# Altium PCB NILINET_RFT.PcbDoc
Units mm, origin at the board's own origin, x right, y up, seen from the top; angles counter-clockwise.
Board outline 40.64 x 75.25 mm, 2 copper layers (Top Layer, Bottom Layer); 32 components, 25 nets, 113 pads, 78 vias.
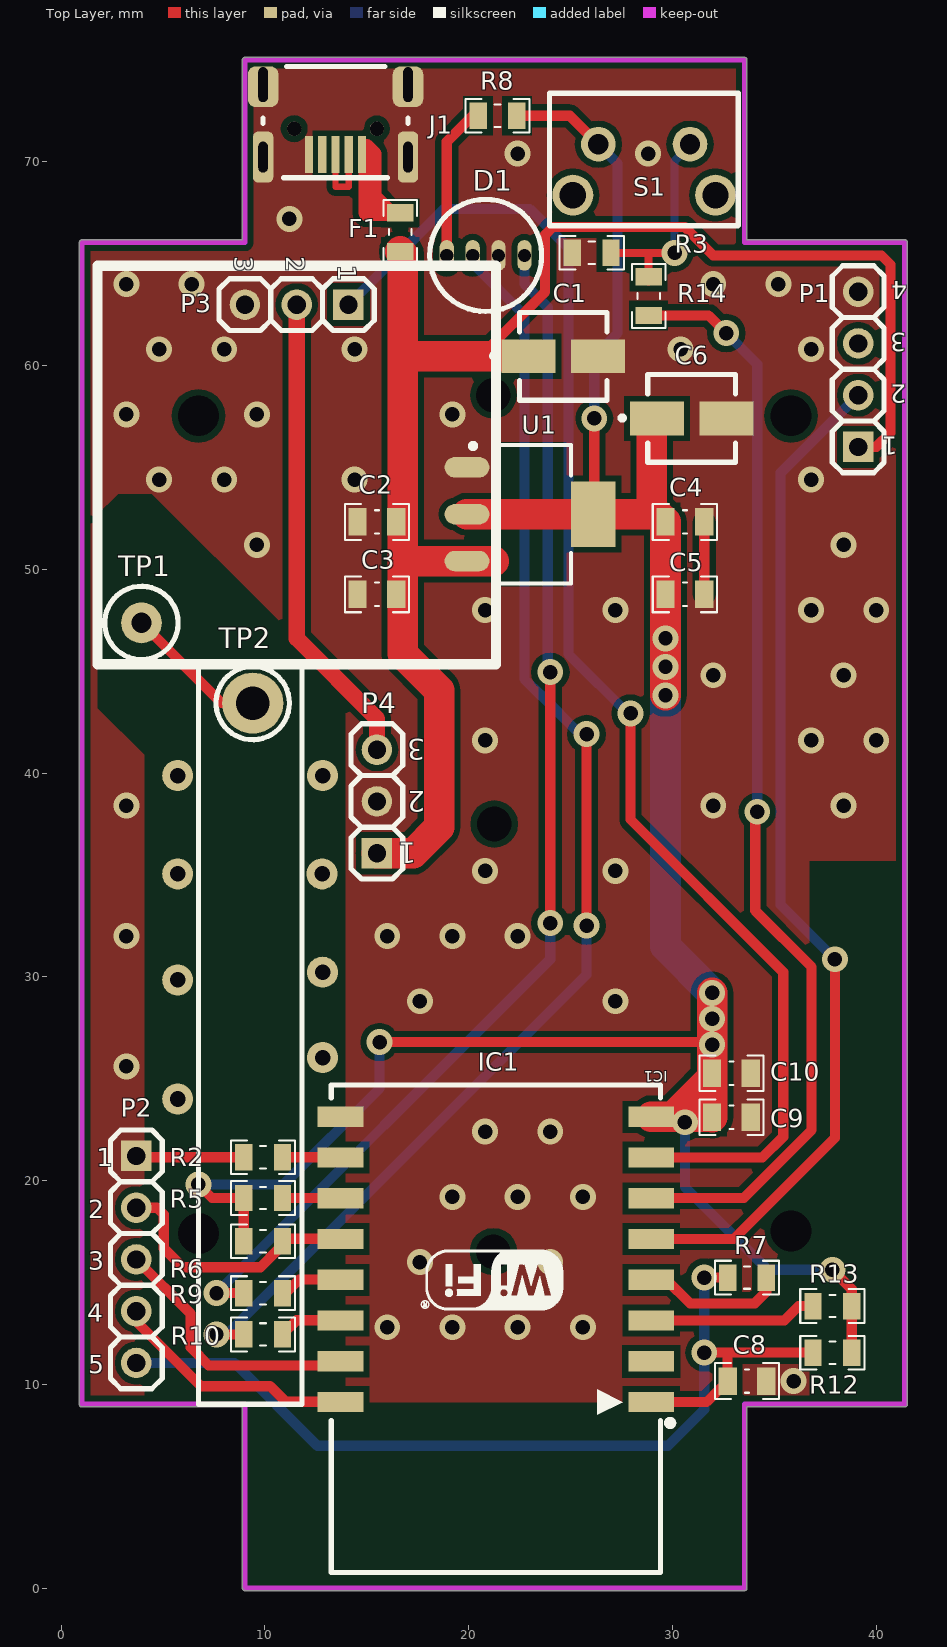
[diagram p0: Top Layer view]
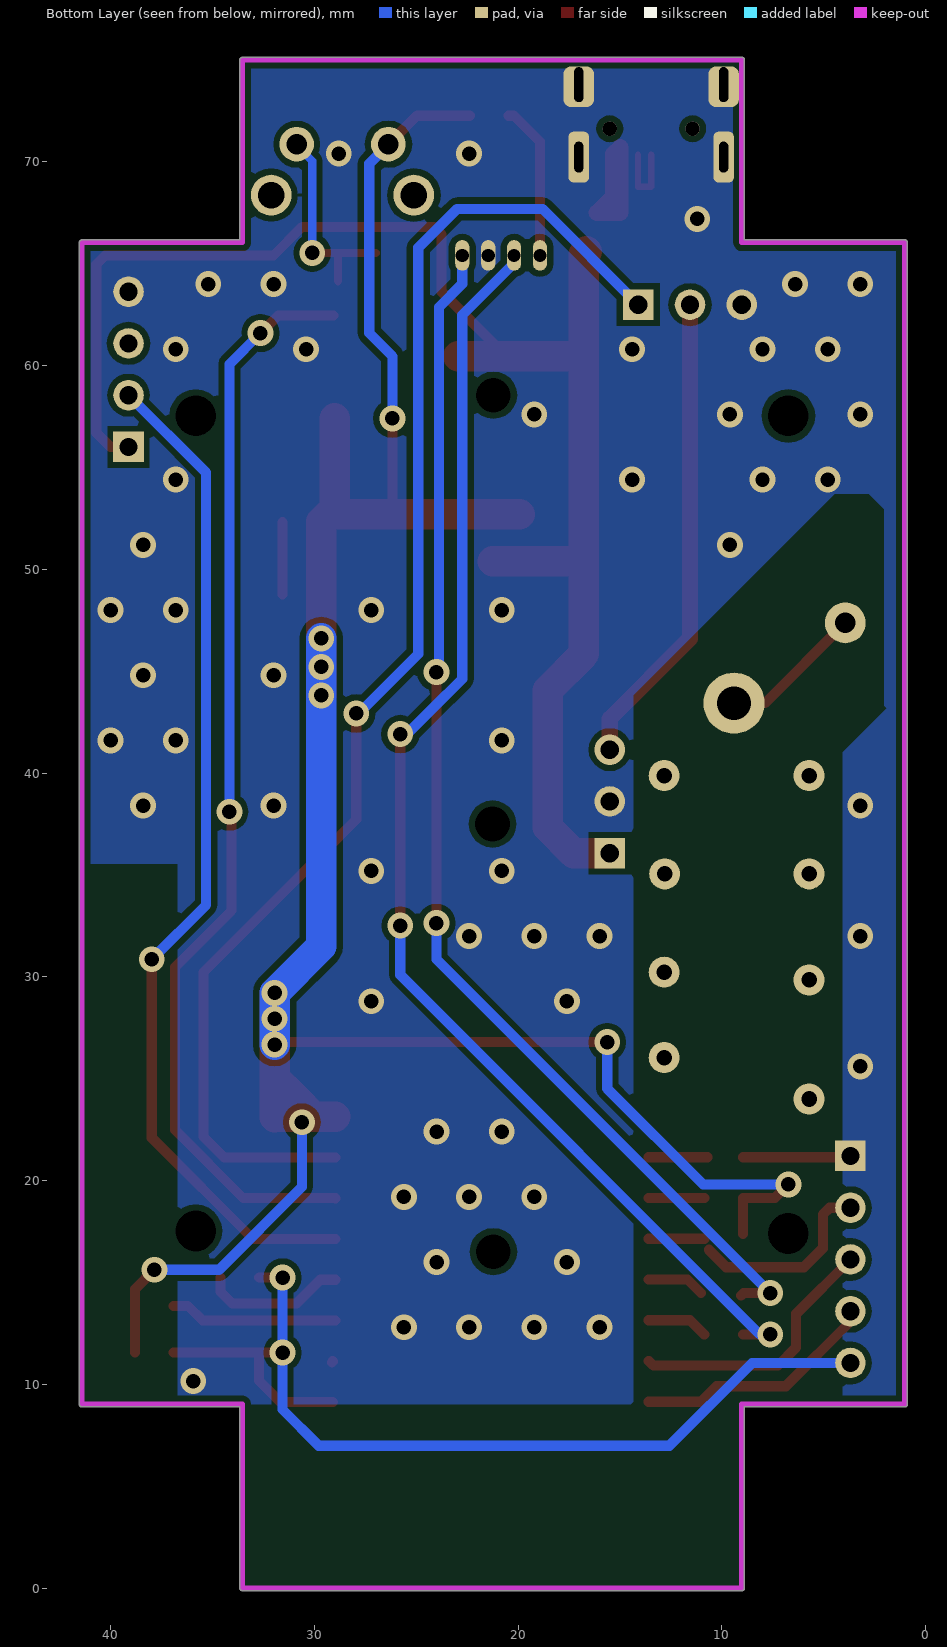
[diagram p1: Bottom Layer view, seen from below]

## Layer stack, top to bottom
Top Solder: solder mask 0.0102, Solder Resist, Dk 3.5
Top Layer: signal copper 0.0356
Dielectric 1: dielectric 0.32, FR-4, Dk 4.8
Bottom Layer: signal copper 0.0356
Bottom Solder: solder mask 0.0102, Solder Resist, Dk 3.5

## Board outline
1.016,8.89 cw(c1.016,9.017) 0.889,9.017 0.889,66.04 cw(c1.016,66.04) 1.016,66.167 8.89,66.167 8.89,75 cw(c9.017,75) 9.018,75.127 33.527,75.127 cw(c33.528,75) 33.655,75 33.655,66.167 41.402,66.167 cw(c41.402,66.04) 41.529,66.04 41.529,9.017 cw(c41.402,9.017) 41.402,8.89 33.655,8.89 33.655,0 cw(c33.528,0) 33.528,-0.127 9.017,-0.127 cw(c9.017,0) 8.89,0 8.89,8.89

## Design rules (kind name [scope] priority, off if disabled: settings)
Clearance [All] p1: gap=0.254 ignorepadtopadclearanceinfootprint=FALSE except(0: Arc-Hole Track-Hole SMDPad-Hole THPad-Hole Via-Hole Fill-Hole Poly-Hole Region-Hole Text-Hole; 0.2: SMDPad-SMDPad SMDPad-THPad SMDPad-Via SMDPad-Fill SMDPad-Region SMDPad-Text; 0.3: Arc-Poly Track-Poly SMDPad-Poly THPad-Poly Via-Poly Fill-Poly Poly-Poly)
PlaneClearance [All] p1: clearance=0.3
PlaneConnect [All] p1: planeconnectstyle=Direct reliefexpansion=0.508 reliefentries=4 reliefconductorwidth=0.254 reliefairgap=0.254
PolygonConnect [All] p1: connectstyle=Direct reliefconductorwidth=0.254 reliefentries=4 polygonreliefangle="90 Angle" airgapwidth=0.254
RoutingVias [All] p1: holewidth=0.7 width=1.27 viastyle="Through Hole" minholewidth=0.7 minwidth=1.27 maxholewidth=0.7 maxwidth=1.27
SolderMaskExpansion [All] p1: expansion=0.102
Width [All] p1: maxlimit=2 minlimit=0.2 preferedwidth=0.3
28 further rules are at their usual default settings.

## Components (designator, comment, footprint, x,y, rotation, side; value= is the part's Value field where it differs from the comment)
C1 "10Uf" UWT(4X5.4) 24.638,60.452 r0 top
C2 "4.7uF" CAP0805 15.494,52.324 r0 top value=100nF
C3 "1uF" CAP0805 15.494,48.768 r0 top value=100nF
C4 "4.7uF" CAP0805 30.607,52.324 r180 top value=100nF
C5 "1uF" CAP0805 30.607,48.768 r180 top value=100nF
C6 "22Uf" UWT(4X5.4) 30.939,57.404 r0 top
C8 "100nF" CAP0805 33.655,10.16 r180 top
C9 "22uF" CAP0805 32.893,23.114 r180 top value=100nF
C10 "100nF" CAP0805 32.893,25.273 r180 top
D1 "RGB_LED" RGB_LED 20.828,65.405 r90 top
F1 "0" RES0805 16.637,66.548 r90 top
IC1 "ESP8266 ESP_12" "ESP8266 ESP_12" 21.336,16.129 r180 top
J1 "USB Connector" MicroUSB111 17.145,75.311 r180 top
P1 "MHDR_1X04" MHDR1X04-254P 39.116,56.007 r90 top
P2 "MHDR_1X05" MHDR1X05-254P 3.683,21.209 r270 top
P3 "MHDR_1X03" MHDR1X03-254P 14.097,62.992 r180 top
P4 "MHDR_1X03" MHDR1X03-254P 15.494,36.068 r90 top
R2 "10K" RES0805 9.906,21.144 r180 top
R3 "10K" RES0805 26.035,65.532 r180 top
R5 "10K" RES0805 9.906,19.144 r180 top
R6 "10K" RES0805 9.906,17.018 r180 top
R7 "0" RES0805 33.655,15.24 r180 top
R8 "220" RES0805 21.414,72.263 r180 top
R9 "220" RES0805 9.906,14.478 r180 top
R10 "220" RES0805 9.906,12.446 r180 top
R12 "10K" RES0805 37.846,11.557 r0 top
R13 "10K" RES0805 37.846,13.843 r0 top
R14 "10K" RES0805 28.829,63.41 r90 top
S1 "Switch PB" SwitchRight 32.211,73.366 r180 top
TP1 "Test Point" "Test Point"#1 3.937,47.371 r0 top
TP2 "Test Point" "Test Point"#2 9.398,43.434 r0 top
U1 "3V3" SOT223 23.114,52.705 r0 top

## Footprints (in the part's own frame and the unit in brackets; to place one, negate y for a bottom-side part, rotate by r counter-clockwise, add the part's x,y. Pads: shape width x height; smd on the part's side, far side on the other; paste and mask are expansions set on the pad)
CAP0805 [mm] "Chip Capacitor, 2-Leads, Body 2/00x1/25mm, IPC Medium Density DESIGNER:ABBAS BASEREH"
  rect 0.9x1.35 smd: 1(-0.95,0) 2(0.95,0)
  silkscreen extent -1.58,-0.87 1.58,0.87, body extent -1.02,-0.65 1.02,0.65, height 0.5
"ESP8266 ESP_12" [mm] "ESP8266 ESP-12"
  rect 2.25x1 smd: 1(-7.625,7) 2(-7.625,5) 3(-7.625,3) 4(-7.625,1) 5(-7.625,-1) 6(-7.625,-3) 7(-7.625,-5) 8(-7.625,-7) 9(7.625,-7) 10(7.625,-5) 11(7.625,-3) 12(7.625,-1) 13(7.625,1) 14(7.625,3) 15(7.625,5) 16(7.625,7)
  silkscreen extent -8.7,-8.57 8.08,15.37, body extent -7.86,-8.52 8.16,15.51, height 3.82
MHDR1X03-254P [mm] "Male Header 1X03 with 2.54 mm Pitch"
  rect 1.5x1.5 hole 0.9: 1(0,0)
  round 1.5 hole 0.9: 2(2.54,0) 3(5.08,0)
  silkscreen extent -1.27,-1.27 6.35,1.27, body extent -1.27,-1.27 6.35,1.27, height 8.43
MHDR1X04-254P [mm] "Male Header 1X04 with 2.54 mm Pitch"
  rect 1.5x1.5 hole 0.9: 1(0,0)
  round 1.5 hole 0.9: 2(2.54,0) 3(5.08,0) 4(7.62,0)
  silkscreen extent -1.27,-1.27 8.89,1.27, body extent -1.27,-1.27 8.89,1.27, height 8.43
MHDR1X05-254P [mm] "Male Header 1X05 with 2.54 mm Pitch"
  rect 1.5x1.5 hole 0.9: 1(0,0)
  round 1.5 hole 0.9: 2(2.54,0) 3(5.08,0) 4(7.62,0) 5(10.16,0)
  silkscreen extent -1.27,-1.27 11.43,1.27, body extent -1.27,-1.27 11.43,1.27, height 8.43
MicroUSB111 [mm]
  rect 0.4x1.8 smd: 1(2.383,4.953) 2(3.033,4.953) 3(3.683,4.953) 4(4.333,4.953) 5(4.983,4.953)
  rrect50% 1x2.5 hole 1.5 slot 0.45 at 0 deg: 5(0.127,5.08) 5(7.239,5.08)
  rrect50% 1.5x2 hole 1.7 slot 0.45 at 0 deg copper offset 0,0.1: 5(0.127,1.524) 5(7.239,1.524)
  round 0.7 hole 0.7: 6(1.651,3.683) 6(5.715,3.683)
  silkscreen extent 0.13,0.64 7.24,6.1
RES0805 [mm] "Chip Resistor, 2-Leads, Body 2/00x1/25mm, IPC Medium Density DESIGNER:ABBAS BASEREH"
  rect 0.85x1.3 smd: 1(-0.95,0) 2(0.95,0)
  silkscreen extent -1.58,-0.82 1.58,0.82, body extent -1.02,-0.65 1.02,0.65, height 0.5
RGB_LED [mm]
  oval 1.5x0.7 hole 0.65: 1(0,1.905) 2(0,0.635) 3(0,-0.635) 4(0,-1.905)
  silkscreen extent -2.75,-2.75 2.75,2.75
SOT223 [mm] "SOT223, 4-Leads, Body 6.5x3.5mm, Pitch 2.30mm-Designer Abbas Basereh"
  oval 2.2x1 smd: 1(-3.2,2.3) 2(-3.2,0) 3(-3.2,-2.3)
  rect 2.2x3.2 smd: 4(3,0)
  Top Layer pour cut-out: -1.7,3.556 1.7,3.556 1.7,-3.556 -1.7,-3.556
  silkscreen extent -3.02,-3.4 1.9,3.47, body extent -3.5,-3.25 3.5,3.25, height 1.7
SwitchRight [mm]
  round 2 hole 1.3: 0(0.1,5) 0(7.1,5)
  round 1.7 hole 1: 1(1.35,2.5) 2(5.85,2.5)
  silkscreen extent -1.02,0 8.25,6.5
"Test Point"#1 [mm]
  round 2 hole 1: 1(0,0)
  silkscreen extent -1.8,-1.8 1.8,1.8, body extent -1.59,-1.58 1.59,1.59, height 5.65
"Test Point"#2 [mm]
  round 3 hole 1.651: 1(0,0)
  silkscreen extent -1.8,-1.8 1.8,1.8, body extent -1.59,-1.58 1.59,1.59, height 5.65
UWT(4X5.4) [mm]
  rect 2.65x1.65 smd: 1(-1.7,0) 2(1.7,0)
  silkscreen extent -3.51,-2.15 2.15,2.15

## Part data
C1 C6: library part UWT1C100MCL1GB, "Capacitor Polarised", Manufacturer_Name=Nichicon, Mouser Part Number=647-UWT1C100MCL1B, RS Part Number=5201854P, Allied_Number=70409828, Allied Price/Stock=https://www.alliedelec.com/nichicon-uwt1c100mcl1gb/70409828/, Datasheet Link=http://www.nichicon.co.jp/english/products/pdfs/e-uwt.pdf, Manufacturer_Part_Number=UWT1C100MCL1GB, Mouser Price/Stock=https://www.mouser.co.uk/ProductDetail/Nichicon/UWT1C100MCL1GB?qs=VVKQmw408U%252BpNF7TgczwPw%3D%3D, RS Price/Stock=http://uk.rs-online.com/web/p/products/5201854P
C2 C3 C4 C5 C8 C9 C10: library part "CAP SMD PACKAGE", "TOTAL CAPACITOR SMD PACK", Data=2017-3-10, Desc.="CAP SMD TOTAL PACKAGES", Designer="Abbas Basereh"
F1 R2 R3 R5 R6 R7 R8 R9 R10 R12 R13 R14: library part "RES SMD PACKAGE", "TOTAL SMD RESISTOR PACK", Data=2017-3-10, Desc.="RES SMD PAKAGES", Designer="Abbas Basereh"
IC1: "ESP8266 ESP-12", IC=ESP8266-EX, LatestReviewer="Zion Blue", LatestRevisionData=14-Apr-2015, LatestRevisionNote="Include 3D body and Footprint", Published=14-Apr-2015, Publisher="Cynetik Group", Vendor=Ai-thinker
J1: library part "USB MICRO", "USB Connector MICRO-B Type", Max Current=1600mA, Category=Connector, ComponentLink1Description=Datasheet, ComponentLink2Description=Reference, Designer="ABBAS BASEREH", Mounting Technology="Surface Mount\Through-Hole", Pin Count=5-7, Publisher="ABBAS BASEREH", Status=Unreleased, Update=1395-11-17
P1: "Male Header 1X04"
P2: "Male Header 1X05"
P3 P4: "Male Header 1X03"
S1: "Push Button Switch"
U1: library part AMS1117-x.x, "x.x Volt, 800mA Low-Dropout Linear Regulator, 4-pin SOT-223", Data=16-12-2016, Designer="Ali Hafizi"

## Free pads (board coordinates)
  round 0 hole 2: 2(6.731,17.399) 2(6.731,57.531) 2(35.814,17.526) 2(35.814,57.531)
  round 0 hole 1.7: 2(21.209,16.51) 2(21.209,58.547) 2(21.25,37.5)
  round 1.524 hole 0.762: 3(5.715,24.003) 3(5.715,29.845) 3(5.715,35.052) 3(5.715,39.878) 3(12.8,35.052) 3(12.827,26.035) 3(12.827,30.226) 3(12.827,39.878)

## Via types
v1: diameter 1.27, hole 0.711, Top Layer to Bottom Layer, tented both sides, 78 vias

## Nets (pads, with @x,y where several pads share a name; then routed paths per layer and width w, separated by ;. In a path a pad name is that pad's centre, name@x,y a point inside that pad or via, vN(x,y) a via of type N, cw(c..) or ccw(c..) an arc to the next point about the centre after c; other vN are vias at no path point)
+3.3V: C4.2 C5.2 C6.1 C9.2 C10.2 IC1.8 R5.2 R6.2 R8.1 R12.2 R13.2 S1.2 U1.2 U1.4 | length 133.3
  Top Layer w0.5: v1(6.731,19.812) 7.399,19.144 R5.2 R6.2@8.956,17.37 ; v1(15.621,26.797) 31.496,26.797 31.656,26.957 v1(31.943,26.67) ; R8.1 24.964,72.263 S1.2 ; U1.4 26.162,52.753 v1(26.162,57.404) ; v1(30.607,22.86) 32.197,22.86 C9.2 ; v1(37.846,15.621) 38.796,14.671 R13.2 R12.2
  Top Layer w1.5: U1.2 U1.4 C4.2@29.276,52.705 ; C6.1@28.985,57.404 28.985,52.996 C4.2@29.276,52.705 ; v1(29.657,43.815) v1(29.657,45.212) v1(29.657,46.609) C5.2 C4.2 C4.2@29.276,52.705 ; C9.2@31.928,23.129 IC1.8 30.024,23.129 30.976,24.081 C10.2@31.943,25.048 ; C9.2 C10.2@31.943,25.048 ; v1(31.943,29.21) v1(31.943,27.94) v1(31.943,26.67) C10.2@31.943,25.048
  Bottom Layer w0.5: v1@6.681,19.812 6.681,19.735 v1@6.858,19.558 ; v1(6.731,19.812) 10.922,19.812 15.621,24.511 v1(15.621,26.797) ; v1(26.162,57.404) 26.162,60.452 27.305,61.595 27.305,69.902 S1.2@26.381,70.826 ; v1(30.607,22.86) 30.607,19.685 34.671,15.621 v1(37.846,15.621)
  Bottom Layer w1.5: v1(29.657,46.609) v1(29.657,45.212) v1(29.657,43.815) 29.657,31.496 v1(31.943,29.21) v1(31.943,27.94) v1(31.943,26.67)
+5V: C1.1 C2.2 C3.2 F1.1 P1.1 P4.1 U1.3 | length 77.8
  Top Layer w0.5: 20.574,60.452 23.749,63.627 23.749,66.421 24.13,66.802 30.607,66.802 32.004,65.405 40.259,65.405 40.702,64.962 40.702,56.704 40.005,56.007 P1.1
  Top Layer w1.5: P4.1 17.272,36.068 18.542,37.338 18.542,44.069 16.764,45.847 16.764,48.768 16.764,50.165 16.764,50.405 ; F1.1 16.764,65.471 16.764,50.405 ; 17.526,60.452 20.574,60.452 C1.1 ; 21.236,50.405 U1.3 16.764,50.405
+12V: P3.2 P4.3 | length 23.2
  Top Layer w0.8: P3.2@11.557,63.246 11.557,46.609 15.494,42.672 P4.3@15.494,41.656
ADC: IC1.2 | length 0.1
  Top Layer w0.5: IC1.2@29.088,11.129 IC1.2@29.135,11.082
EN: IC1.3 R13.1 | length 8.2
  Top Layer w0.5: IC1.3 35.481,13.129 36.195,13.843 R13.1
GND: C1.2 C2.1 C3.1 C4.1 C5.1 C6.2 C8.1 C9.1 C10.1 D1.3 IC1.9 J1.5 P1.4 P2.1 P3.3 P4.2 R2.2 R3.2 U1.1 | length 8.9
  Top Layer w0.5: P2.1 3.748,21.144 R2.2 ; C5.1 C4.1
  other v1: 35.941,10.16 16,12.8 19.2,12.8 22.4,12.8 25.6,12.8 17.6,16 24,16 19.2,19.2 22.4,19.2 25.6,19.2 20.8,22.4 24,22.4 3.2,25.6 17.6,28.8 27.2,28.8 3.2,32 16,32 19.2,32 22.4,32 20.8,35.2 27.2,35.2 3.2,38.4 32,38.4 38.4,38.4 20.8,41.6 36.8,41.6 40,41.6 32,44.8 38.4,44.8 20.8,48 27.2,48 36.8,48 40,48 9.6,51.2 38.4,51.2 4.8,54.4 8,54.4 14.4,54.4 36.8,54.4 3.2,57.6 9.6,57.6 19.2,57.6 4.8,60.8 8,60.8 14.4,60.8 30.4,60.8 36.8,60.8 3.2,64 6.4,64 32,64 35.2,64 11.2,67.2 22.4,70.4 28.8,70.4
GPIO0: IC1.12 P2.2 R6.1 | length 12.2
  Top Layer w0.5: P2.2 4.699,18.669 5.035,18.333 5.035,16.682 5.969,15.748 9.779,15.748 R6.1@10.631,16.6 ; R6.1@10.856,17.145 10.857,17.144 IC1.12@13.579,17.144
GPIO2: IC1.11 R5.1 | length 2.7
  Top Layer w0.5: R5.1 IC1.11@13.579,19.144
GPIO4: IC1.13 R9.1 | length 2.8
  Top Layer w0.5: R9.1@11.018,14.478 11.684,15.144 IC1.13@13.579,15.144
GPIO5: IC1.14 R10.1 | length 3
  Top Layer w0.5: R10.1@10.859,12.446 11.557,13.144 IC1.14@13.579,13.144
GPIO12: R3.1 R14.2 S1.1 | length 10.1
  Top Layer w0.4: R3.1 28.829,65.532 ; R14.2@28.829,64.135 R14.2 28.829,65.532 ; v1(30.099,65.532) 28.829,65.532
  Bottom Layer w0.4: v1(30.099,65.532) 30.099,70.044 S1.1@30.881,70.826
GPIO13: IC1.7 P3.1 | length 68.6
  Top Layer w0.5: v1(27.94,42.926) 27.94,37.719 35.433,30.226 35.433,22.148 34.414,21.129 IC1.7
  Bottom Layer w0.5: P3.1 18.796,67.691 22.987,67.691 24.892,65.786 24.892,45.847 v1@27.94,42.799
GPIO14: IC1.5 P1.2 | length 50.2
  Top Layer w0.5: IC1.5 33.004,17.129 37.973,22.098 37.973,23.368 37.973,23.622 v1(37.973,30.861)
  Bottom Layer w0.5: v1(37.973,30.861) 35.306,33.528 35.306,54.737 P1.2
GPIO15: IC1.10 R2.1 | length 2.9
  Top Layer w0.5: R2.1@10.693,21.144 IC1.10@13.579,21.144
GPIO16: IC1.4 R7.1 | length 7.1
  Top Layer w0.5: IC1.4 29.702,15.129 30.861,13.97 34.036,13.97 34.605,14.539 R7.1
NetD1_1: D1.1 R8.2 | length 7.7
  Top Layer w0.5: D1.1 18.923,70.993 20.193,72.263 R8.2
NetD1_2: D1.2 R10.2 | length 65
  Top Layer w0.5: v1(7.62,12.446) R10.2 ; v1(25.781,32.512) 25.527,32.512 25.781,32.766 v1(25.781,41.91)
  Bottom Layer w0.5: v1(7.62,12.446) 8.128,12.446 25.781,30.099 v1(25.781,32.512) ; D1.2 20.193,65.024 22.733,62.484 22.733,44.617 23.531,43.819 23.554,43.819 25.463,41.91 v1(25.781,41.91)
NetD1_4: D1.4 R9.2 | length 59.9
  Top Layer w0.5: v1(7.62,14.478) 8.927,14.478 R9.2@9.054,14.351 ; v1(24.003,32.639) v1(24.003,44.958)
  Bottom Layer w0.5: v1(7.62,14.478) 24.003,30.861 v1(24.003,32.639) ; D1.4 22.733,64.008 23.876,62.865 23.876,45.212 24.13,44.958 v1(24.003,44.958)
NetF1_2: F1.2 J1.1 | length 8.5
  Top Layer w0.8: 15.318,67.83 15.318,69.088 15.318,70.384 14.986,70.716 14.986,67.498 16.129,67.498 15.318,68.309
NetIC1_6: IC1.6 R14.1 | length 54.4
  Top Layer w0.5: IC1.6 28.976,19.144 33.495,19.144 36.83,22.479 36.83,30.48 34.061,33.249 34.061,37.998 v1(34.163,38.1) ; R14.1@29.054,62.46 31.774,62.46 v1(32.639,61.595) v1@32.639,61.87
  Bottom Layer w0.5: v1(32.639,61.595) 34.163,60.071 v1(34.163,38.1)
NetJ1_2: J1.2 J1.3 | length 3.8
  Top Layer w0.3: J1.3 13.462,68.777 14.112,68.777 J1.2
NetTP1_1: TP1.1 TP2.1 | length 7.1
  Top Layer w0.5: TP1.1 7.874,43.434 TP2.1
RST: C8.2 IC1.1 P2.5 R7.2 R12.1 | length 48.8
  Top Layer w0.5: IC1.1@29.088,9.129 31.674,9.129 C8.2 32.705,11.491 32.639,11.557 ; v1(31.557,11.557) 32.639,11.557 ; v1(31.557,15.24) R7.2 ; R12.1 32.639,11.557
  Bottom Layer w0.5: P2.5 8.509,11.049 12.573,6.985 29.777,6.985 31.557,8.765 v1(31.557,11.557) v1(31.557,15.24) v1@31.557,15.296
RX: IC1.15 P2.3 | length 13.1
  Top Layer w0.5: P2.3 6.35,13.462 6.35,11.811 7.239,10.922 13.357,10.922 IC1.15@13.579,11.144
TX: IC1.16 P2.4 | length 12
  Top Layer w0.5: P2.4 3.683,13.081 6.858,9.906 10.25,9.906 11.012,9.144 IC1.16@13.579,9.144
pads on no net: J1.4 J1.6 P1.3 S1.0

## Polygon pours and split planes (outlines as drawn)
GND on Top Layer (solid, remove dead copper, pour order 28): 1.016,66.04 9.017,66.04 9.017,75 33.528,75 33.528,66.04 41.402,66.04 41.402,35.687 36.703,35.687 36.703,9.017 36.591,9.129 13.97,9.129 13.97,44.196 4.445,53.721 2.794,53.721 1.524,52.451 1.778,52.197 1.778,43.18 4.064,40.894 4.064,9.271 4.318,9.017 1.016,9.017
no net on Top Layer "Top Layer-No Net" (solid, remove dead copper, pour order 14): 9.017,75
GND on Bottom Layer (solid, remove dead copper, pour order 30): 1.016,66.04 8.763,66.04 9.017,66.294 9.017,75 33.528,75 33.528,66.04 41.275,66.04 41.275,35.687 41.402,35.56 36.703,35.56 36.703,9.144 36.83,9.017 14.478,9.017 14.351,9.144 14.351,43.815 4.445,53.721 2.794,53.721 2.032,52.959 2.032,43.307 1.905,43.18 4.064,41.021 4.064,9.017 3.937,8.89 1.143,8.89 1.016,9.017

## Keep-outs
Keep-Out Layer:
  lines w0.254: 1.016,9.017 1.016,66.04 9.017,66.04 9.017,75 33.528,75 33.528,66.04 41.402,66.04 41.402,9.017 33.528,9.017 33.528,0 9.017,0 9.017,9.017 1.016,9.017

## Silkscreen, mask and mechanical layers (free items; w line width, h text height)
Top Overlay:
  lines w0.254: 6.731,9.017 6.731,45.466 11.811,45.466 11.811,9.017 6.731,9.017
  lines w0.5: 1.778,64.77 1.778,45.339 21.336,45.339 21.336,64.897 1.778,64.897

## Text inside footprints (layer, text, board x,y; h text height)
IC1: Mechanical 13 "ANTENNA AREA" at 29.209,1.255 h0.9 r180; Mechanical 13 "CUTOUT POLYGON" at 29.209,1.763 h0.9 r180
P1: Top Overlay "1" at 41.052,56.515 h0.9 r180; Top Overlay "2" at 41.48,59.055 h0.9 r180; Top Overlay "3" at 41.48,61.595 h0.9 r180; Top Overlay "4" at 41.528,64.135 h0.9 r180
P2: Top Overlay "1" at 1.747,20.701 h0.9; Top Overlay "1" at 1.747,20.701 h0.9; Top Overlay "2" at 1.319,18.161 h0.9; Top Overlay "3" at 1.319,15.621 h0.9; Top Overlay "4" at 1.271,13.081 h0.9; Top Overlay "5" at 1.319,10.541 h0.9
P3: Top Overlay "3" at 8.509,65.356 h0.9 r270; Top Overlay "2" at 11.049,65.356 h0.9 r270; Top Overlay "1" at 13.589,64.928 h0.9 r270
P4: Top Overlay "3" at 17.858,41.656 h1 r180; Top Overlay "2" at 17.858,39.116 h1 r180; Top Overlay "1" at 17.43,36.576 h1 r180